# Altium PCB 转接板PCB.PcbDoc
Units mil, origin at the board's own origin, x right, y up, seen from the top; angles counter-clockwise.
Board outline 4741 x 3045 mil, 2 copper layers (Top Layer, Bottom Layer); 31 components, 43 nets, 241 pads, 52 vias.
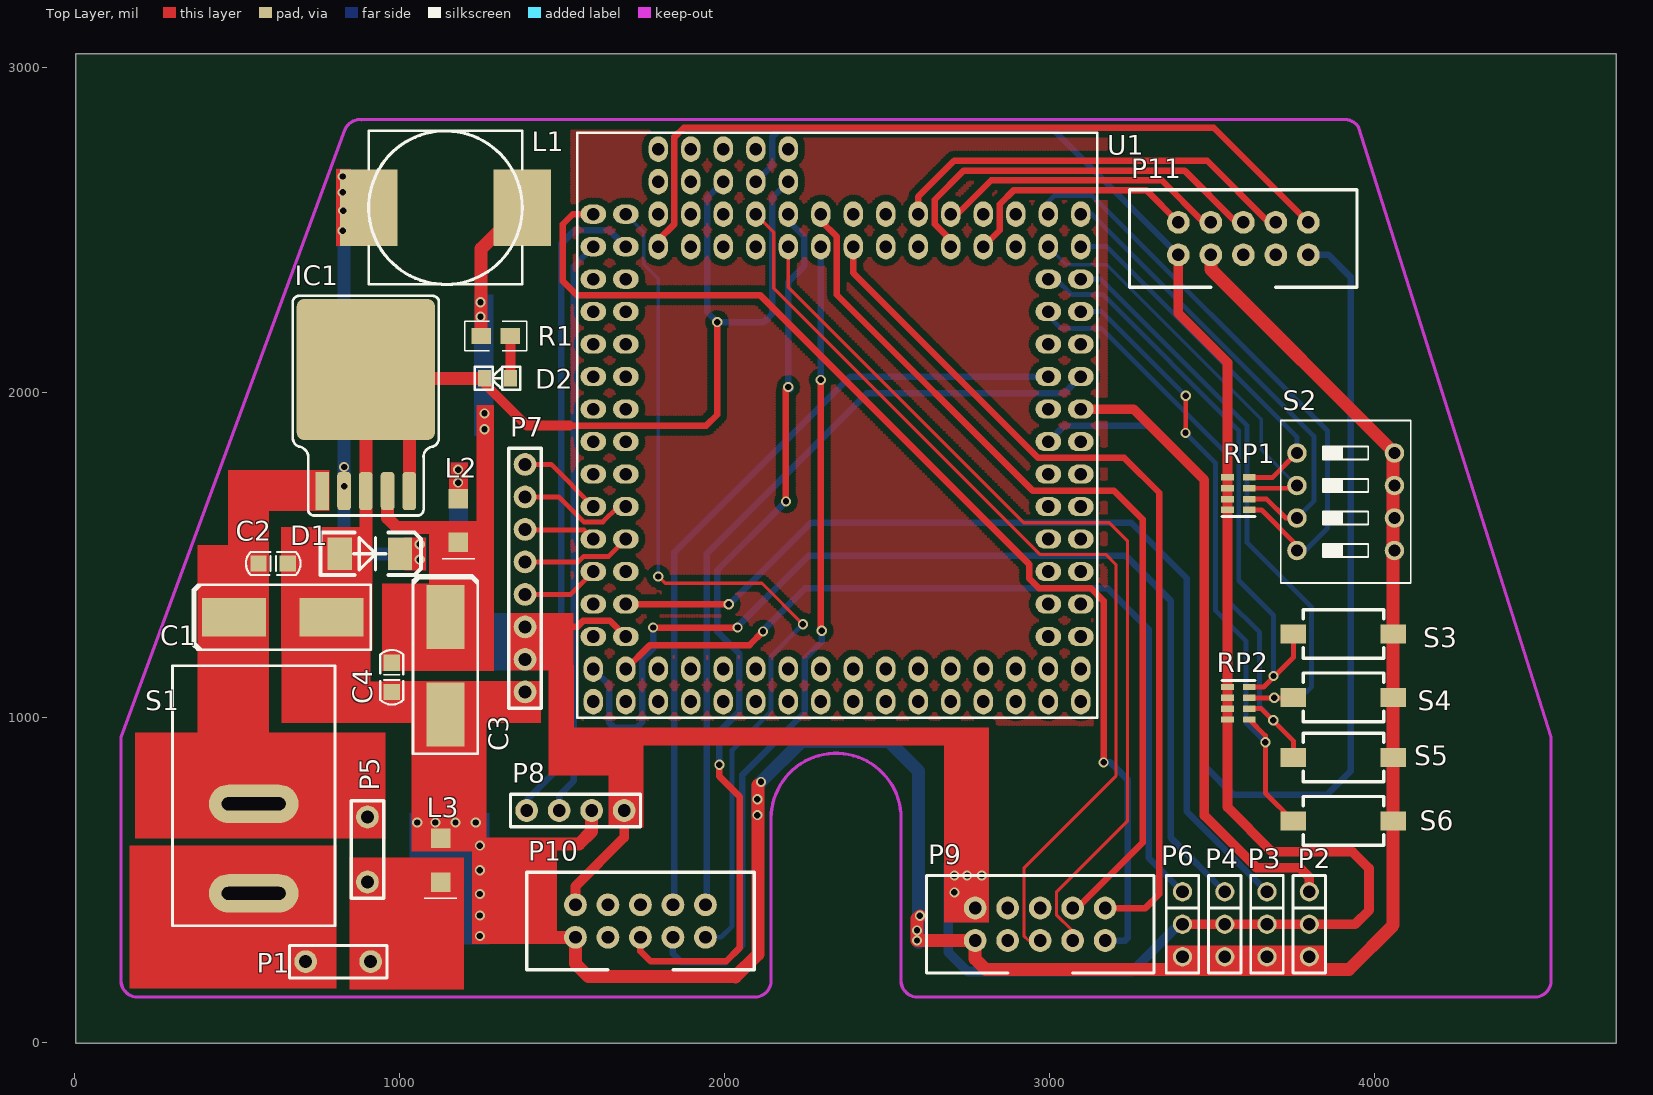
[diagram p0: Top Layer view]
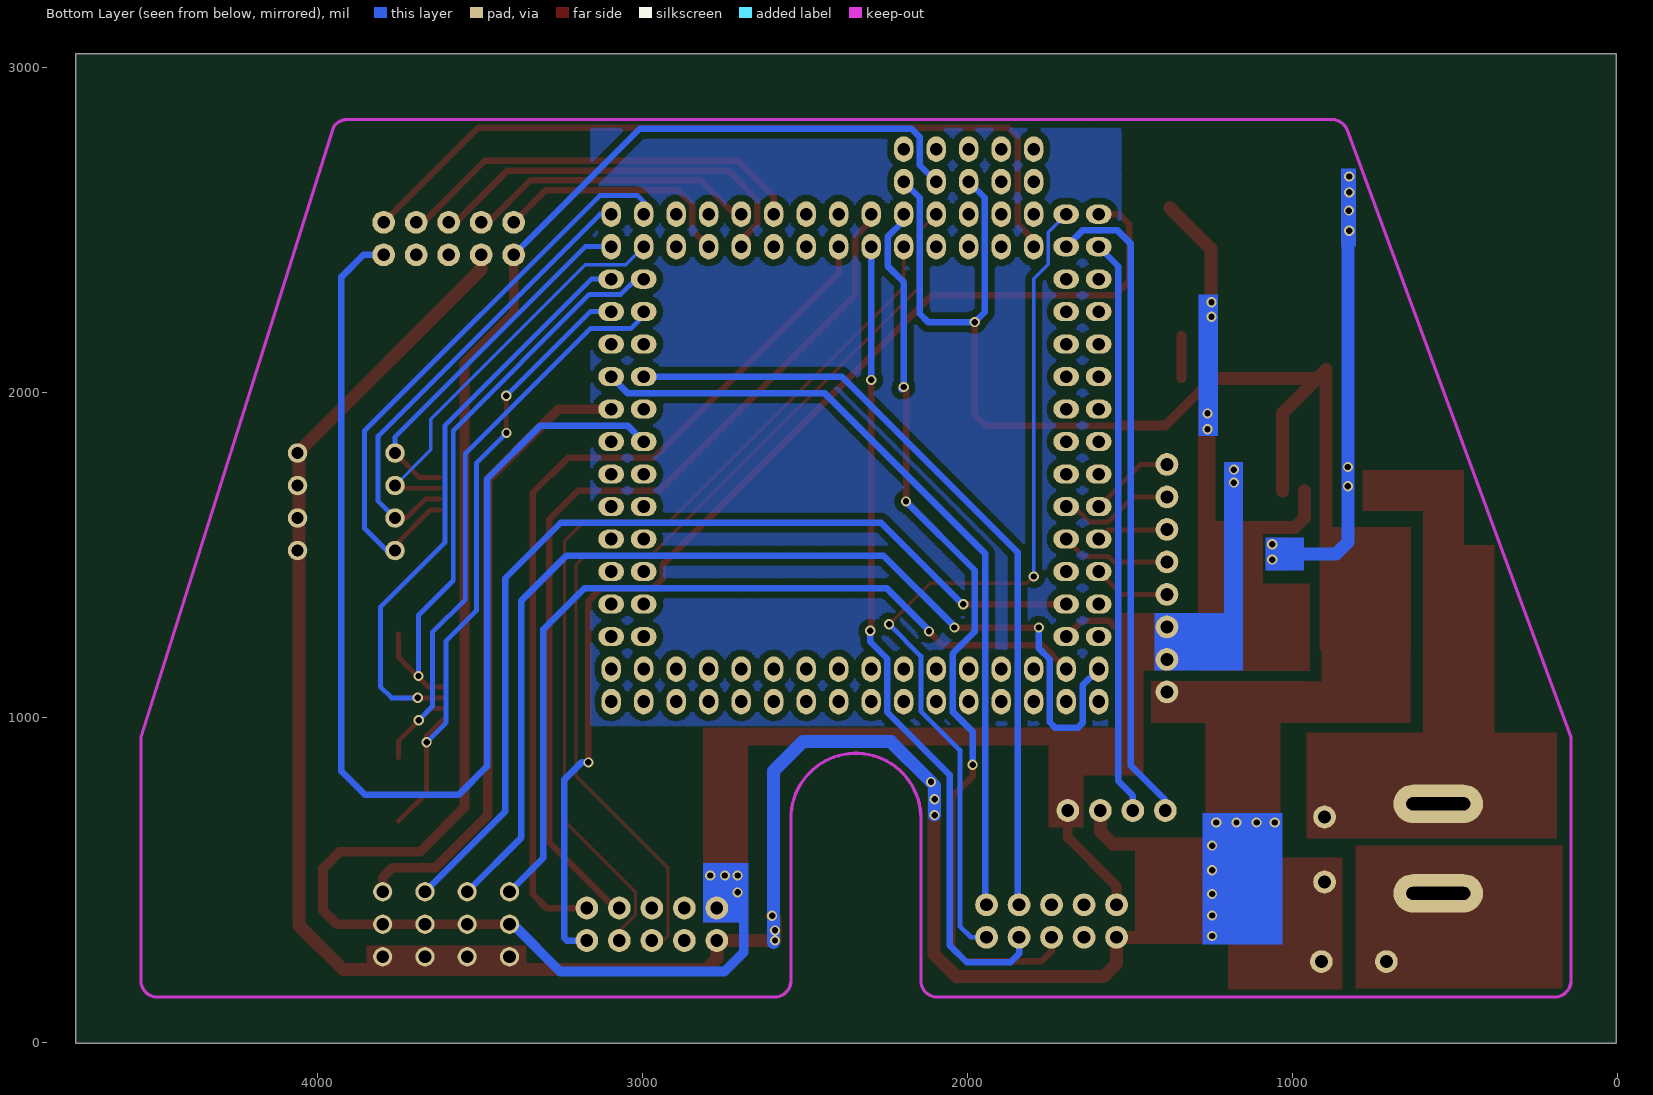
[diagram p1: Bottom Layer view, seen from below]

## Layer stack, top to bottom
Top Layer: signal copper 1.4
Dielectric: dielectric 12.6, FR-4, Dk 4.8
Bottom Layer: signal copper 1.4

## Board outline
4743,-3 2,-3 2,3034 2,3042 4743,3042

## Design rules (kind name [scope] priority, off if disabled: settings)
Clearance [All] p1: gap=20
PolygonConnect [All] p1: connectstyle=Relief reliefconductorwidth=20 reliefentries=4 polygonreliefangle="90 Angle"
RoutingVias [All] p1: holewidth=28 width=50 viastyle="Through Hole" minholewidth=28 minwidth=50 maxholewidth=28 maxwidth=50
SilkscreenOverComponentPads [All] p1: minsilkscreentomaskgap=10
SolderMaskExpansion [All] p1: expansion=4
Width [All] p1: maxlimit=50 minlimit=10 preferedwidth=20
27 further rules are at their usual default settings.

## Components (designator, comment, footprint, x,y, rotation, side; value= is the part's Value field where it differs from the comment)
C1 "470" ccc 490,1308 r0 top
C2 "" C0805 565,1473 r0 top
C3 "470" ccc 1140,1308 r270 top
C4 "" C0805 975,1168 r270 top
D1 "D Zener" D1810 815,1503 r0 top
D2 "LED2" D0805 1340,2043 r180 top
IC1 "LM2596-05" TO-263-5 895,1883 r0 top
L1 "Inductor" L-12*12MM-S 1140,2568 r0 top
L2 "Inductor" L1206 1180,1538 r90 top
L3 "Inductor" L1206 1125,493 r90 top
P1 "Header 2" SIP2-1 710,248 r0 top
P2 "Header 3" SIP3 3798,463 r270 top
P3 "Header 3" SIP3 3668,463 r270 top
P4 "Header 3" SIP3 3538,463 r270 top
P5 "Header 2" SIP2-1 900,693 r270 top
P6 "Header 3" SIP3 3408,463 r270 top
P7 "Header 8" SIP8 1385,1778 r270 top
P8 "Header 4" SIP4 1690,713 r180 top
P9 "Header 5X2" SIP10 2620,213 r90 top
P10 "Header 5X2" SIP10 1390,223 r90 top
P11 "Header 5X2" SIP10 3245,2323 r90 top
R1 "Res2" R0805 1250,2173 r0 top
RP1 "R  PAIZU" 8P4R-0805#1 3575,1688 r90 top
RP2 "R  PAIZU" 8P4R-0805#2 3575,1043 r270 top
S1 "SW-SPST" PCBComponent_1 550,458 r90 top
S2 "SW DIP-4" BM-SW-4 3760,1513 r90 top
S3 "SW-PB" SW-SMD1 4056,1256 r180 top
S4 "SW-PB" SW-SMD1 4056,1061 r180 top
S5 "SW-PB" SW-SMD1 4056,876 r180 top
S6 "SW-PB" SW-SMD1 4056,681 r180 top
U1 "K60" K60-MK 1595,348 r90 top

## Footprints (in the part's own frame and the unit in brackets; to place one, negate y for a bottom-side part, rotate by r counter-clockwise, add the part's x,y. Pads: shape width x height; smd on the part's side, far side on the other; paste and mask are expansions set on the pad)
8P4R-0805#1 [mm]
  rect 0.5x1 smd: 1(-1.27,-0.974) 2(-0.423,-0.974) 3(0.423,-0.974) 4(1.27,-0.974) 5(1.27,0.72) 6(0.423,0.72) 7(-0.423,0.72) 8(-1.27,0.72)
  silkscreen extent -1.78,-1.4 -1.78,1.14
8P4R-0805#2 [mm]
  rect 0.5x1 smd: 1(-1.27,0.974) 2(-0.423,0.974) 3(0.423,0.974) 4(1.27,0.974) 5(1.27,-0.72) 6(0.423,-0.72) 7(-0.423,-0.72) 8(-1.27,-0.72)
  silkscreen extent -1.78,-1.14 -1.78,1.4
BM-SW-4 [mil]
  round 60 hole 36: 1(0,-300) 2(100,-300) 3(200,-300) 4(300,-300) 5(300,0) 6(200,0) 7(100,0) 8(0,0)
  silkscreen extent -100,-350 400,50
C0805 [mil]
  rect 50x50 smd: 1(0,0) 2(90,0)
  silkscreen extent -39,-36 129,36, body extent 6,-24 85,23, height 47
ccc [mm]
  rect 5x3 smd: 1(0,0) 2(7.62,0)
  silkscreen extent -3.25,-2.54 10.67,2.54
D0805 [mil]
  rect 40x50 smd: 1(0,0) 2(80,0)
  silkscreen extent -30,-35 110,35, body extent 0,-17 81,19, height 33
D1810 [mil]
  rect 75x100 smd: 1(0,0) 2(185,0)
  silkscreen extent -60,-65 250,65, body extent -18,-76 202,78, height 98
K60-MK [mm]
  round 1.5 on Top Overlay: 0(16.51,2.54)
  oval 2x1.5 hole 1: 1(17.78,0) 2(20.32,0) 3(17.78,-2.54) 4(20.32,-2.54) 5(17.78,-5.08) 6(20.32,-5.08) 7(17.78,-7.62) 8(20.32,-7.62) 9(17.78,-10.16) 10(20.32,-10.16) 11(17.78,-12.7) 12(20.32,-12.7) 13(17.78,-15.24) 14(20.32,-15.24) 15(17.78,-17.78) 16(20.32,-17.78) 17(17.78,-20.32) 18(20.32,-20.32) 19(17.78,-22.86) 20(20.32,-22.86) 21(17.78,-25.4) 22(20.32,-25.4) 23(17.78,-27.94) 24(20.32,-27.94) 25(17.78,-30.48) 26(20.32,-30.48) 27(17.78,-33.02) 28(20.32,-33.02) 29(17.78,-35.56) 30(20.32,-35.56) 31(17.78,-38.1) 32(20.32,-38.1) 57(53.34,-38.1) 58(53.34,-35.56) 59(55.88,-38.1) 60(55.88,-35.56) 61(55.88,-33.02) 62(53.34,-33.02) 63(55.88,-30.48) 64(53.34,-30.48) 65(55.88,-27.94) 66(53.34,-27.94) 67(55.88,-25.4) 68(53.34,-25.4) 69(55.88,-22.86) 70(53.34,-22.86) 71(55.88,-20.32) 72(53.34,-20.32) 73(55.88,-17.78) 74(53.34,-17.78) 75(55.88,-15.24) 76(53.34,-15.24) 77(55.88,-12.7) 78(53.34,-12.7) 79(55.88,-10.16) 80(53.34,-10.16) 81(55.88,-7.62) 82(53.34,-7.62) 83(55.88,-5.08) 84(53.34,-5.08) 113(58.42,-5.08) 114(60.96,-5.08) 115(58.42,-7.62) 116(60.96,-7.62) 117(58.42,-10.16) 118(60.96,-10.16) 119(58.42,-12.7) 120(60.96,-12.7) 121(58.42,-15.24) 122(60.96,-15.24)
  oval 1.5x2 hole 1: 33(22.86,-38.1) 34(22.86,-35.56) 35(25.4,-38.1) 36(25.4,-35.56) 37(27.94,-38.1) 38(27.94,-35.56) 39(30.48,-38.1) 40(30.48,-35.56) 41(33.02,-38.1) 42(33.02,-35.56) 43(35.56,-38.1) 44(35.56,-35.56) 45(38.1,-38.1) 46(38.1,-35.56) 47(40.64,-38.1) 48(40.64,-35.56) 49(43.18,-38.1) 50(43.18,-35.56) 51(45.72,-38.1) 52(45.72,-35.56) 53(48.26,-38.1) 54(48.26,-35.56) 55(50.8,-38.1) 56(50.8,-35.56) 85(55.88,-2.54) 86(53.34,-2.54) 87(55.88,0) 88(53.34,0) 89(50.8,0) 90(50.8,-2.54) 91(48.26,0) 92(48.26,-2.54) 93(45.72,0) 94(45.72,-2.54) 95(43.18,0) 96(43.18,-2.54) 97(40.64,0) 98(40.64,-2.54) 99(38.1,0) 100(38.1,-2.54) 101(35.56,0) 102(35.56,-2.54) 103(33.02,0) 104(33.02,-2.54) 105(30.48,0) 106(30.48,-2.54) 107(27.94,0) 108(27.94,-2.54) 109(25.4,0) 110(25.4,-2.54) 111(22.86,0) 112(22.86,-2.54)
  silkscreen extent 16.51,-39.37 62.23,1.27
L1206 [mil]
  rect 60x60 smd: 1(0,0) 2(135,0)
  silkscreen extent -50,-50 -50,50, body extent 5,-32 131,31, height 43
L-12*12MM-S [mm]
  rect 4.5x6 smd: 1(-6,0) 2(6,0)
  silkscreen extent -6,-6 6,6, body extent -6.05,-5.94 5.95,6.06, height 8
PCBComponent_1 [mm]
  oval 3x7 hole 1 slot 5 at 90 deg: 1(0,0) 2(7,0)
  silkscreen extent -2.54,-6.35 17.78,6.35
R0805 [mil]
  rect 60x50 smd: 1(0,0) 2(90,0)
  silkscreen extent -50,-45 140,45, body extent 6,-25 85,25, height 22
SIP2-1 [mil]
  round 70 hole 40: 1(0,0) 2(200,0)
  silkscreen extent -50,-50 250,50
SIP3 [mm]
  round 1.5 hole 1: 1(0,0) 2(2.54,0) 3(5.08,0)
  silkscreen extent -1.27,-1.27 6.35,1.27
SIP4 [mil]
  round 70 hole 39.37: 1(0,0) 2(100,0) 3(200,0) 4(300,0)
  silkscreen extent -50,-50 350,50
SIP8 [mil]
  round 70 hole 39.37: 1(0,0) 2(100,0) 3(200,0) 4(300,0) 5(400,0) 6(500,0) 7(600,0) 8(700,0)
  silkscreen extent -50,-50 750,50
SIP10 [mil]
  round 70 hole 39.37: 1(100,-150) 2(200,-150) 3(100,-250) 4(200,-250) 5(100,-350) 6(200,-350) 7(100,-450) 8(200,-450) 9(100,-550) 10(200,-550)
  silkscreen extent 0,-700 300,0
SW-SMD1 [mm]
  rect 2x1.5 smd: 1(0,0) 2(7.8,0)
  silkscreen extent 0.73,-1.9 7.03,1.9, body extent -0.06,-1.95 7.83,1.9, height 2.5
TO-263-5 [mm]
  rect 1.07x3 smd: 1(-3.4,-4.75)
  rrect50% 1.07x3 smd: 2(-1.7,-4.75) 3(0,-4.75) 4(1.7,-4.75) 5(3.4,-4.75)
  rrect10% 10.8x11 smd: 3(0,4.75)
  silkscreen extent -5.7,-6.66 5.7,10.5, body extent -5.14,-4.8 5.09,9.55, height 4.48

## Part data
C1 C2 C3 C4: library part "Cap Pol2", "Polarized Capaci"
D2: "Typical RED, GREEN, YELLOW, AMB"
P1 P2 P3 P4 P5 P6 P7 P8: "He"
P9 P10 P11: "Header, 5-Pi"
S1: "Single-Pole, Single-T"
S2: "DIP Switch, 4 Pos"

## Via types
v1: diameter 31.5, hole 19.68, Top Layer to Bottom Layer, 52 vias

## Nets (pads, with @x,y where several pads share a name; then routed paths per layer and width w, separated by ;. In a path a pad name is that pad's centre, name@x,y a point inside that pad or via, vN(x,y) a via of type N, cw(c..) or ccw(c..) an arc to the next point about the centre after c; other vN are vias at no path point)
5V: L2.2 P2.2 P3.2 P4.2 P6.2 P7.6 P7.7 P8.1 P9.2 P10.2 P11.1 RP1.5 RP1.6 RP1.7 RP1.8 RP2.5 RP2.6 RP2.7 RP2.8 U1.112 U1.119 | length 6367.2
  Top Layer w20: P7.6 1545.12,1278 1564.64,1297.53 1645.47,1297.53 U1.112
  Top Layer w30: P7.7 P7.6 ; P10.2 1540,480 1690,630 P8.1 ; P11.1 3395,2243 3546.67,2091.33 RP1.5 RP1.6 RP1.7 RP1.8 RP2.8 RP2.7 RP2.6 RP2.5 3546.67,798 ; P6.2 P4.2 P3.2 P2.2 3939,363 3982,406 3982,535 3931,586 3684,586 3546.67,723.33 3546.67,798 ; 3546.67,762.33 3546.67,798
  Bottom Layer w20: U1.119 2145.47,2698.47 2145.47,2785.47 2171,2811 3007,2811 P11.1
  Bottom Layer w30: 2687,437 2687,283 2687,278 2747,218 3252,218 3397,363 P6.2
  other v1: 2706,461 2706,513 2745,513 2790,513 1179,1722 1179,1762
C1: P11.2 U1.64 | length 759.9
  Top Layer w20: U1.64 2845.47,2498.47 2845.47,2578.36 2889.12,2622 3296,2622 P11.2
C2: P11.4 U1.65 | length 896.5
  Top Layer w20: U1.65 2715.12,2548 2819.12,2652 3343.78,2652 3472.78,2523 P11.4
C3: P11.6 U1.66 | length 1217.5
  Top Layer w20: U1.66 2695,2468.12 2645.47,2517.64 2645.47,2592.47 2735,2682 3413.78,2682 3572.78,2523 P11.6
C4: P11.8 U1.67 | length 1277.8
  Top Layer w20: U1.67 2595,2602 2705,2712 3483.78,2712 3672.78,2523 P11.8
C5: P11.10 U1.84 | length 2440.8
  Top Layer w20: U1.84 1795,2468.12 1844.53,2517.64 1844.53,2785.53 1873,2814 3504,2814 P11.10
C6: P11.9 U1.46 | length 3648.5
  Bottom Layer w20: U1.46 3044.53,1897.53 3312.47,1897.53 3476,1734 3476,850 3565,761 3852,761 3925,834 3925,2355 3857,2423 P11.9
CE: P7.2 U1.104 | length 361.4
  Top Layer w15: P7.2 1488.65,1678 1565.68,1600.97 1624.32,1600.97 1671.35,1648 U1.104
CLK: P7.5 U1.107 | length 239
  Top Layer w15: P7.5 1525,1378 U1.107
D0: P2.1 U1.47 | length 1948.4
  Top Layer w30: U1.47 3257,1948 3475,1730 3475,698 3636,537 3768,537 3798,507 P2.1
DC: P7.3 U1.105 | length 222.4
  Top Layer w15: P7.3 1387.03,1575.97 1567.03,1575.97 U1.105
DGND: C1.2 C2.2 C3.2 C4.2 D1.1 D2.2 IC1.3 IC1.5 L3.2 P2.3 P3.3 P4.3 P6.3 P7.8 P8.2 P9.1 P10.1 P11.3 S2.1 S2.2 S2.3 S2.4 S3.1 S4.1 S5.1 S6.1 U1.117 U1.121 | length 10640
  Top Layer w20: 1522,1897.53 1942.53,1897.53 1976,1931 v1(1976,2216)
  Top Layer w30: D2.2 1260,2027.53 1390,1897.53 1522,1897.53
  Top Layer w40: 895,1525 895,1695.99 895,2070.01 1028.86,1936.15 IC1.5 ; IC1.3@922.01,2043 D2.2 ; 1211,610 1551,610 1590,649 P8.2 ; v1@1246,399 1322,323 P10.1 1540,242 1580,202 2031,202 ; 2032,201 2101,270 v1@2101,791 ; v1(2600,389) 2591,380 v1(2591,344) v1(2591,313) P9.1 2770,256 2802,224 3920,224 4056,360 S6.1 S5.1 S4.1 S3.1 4056,1813 S2.4 3495,2378 P11.3
  Bottom Layer w20: U1.117 1945.47,2598.47 1945.47,2246.53 v1(1976,2216) 2120,2216 2145.47,2241.47 2145.47,2598.47 U1.121
  Bottom Layer w40: v1(2100,699) 2100,790 v1(2111,801) 2234.73,924.73 2505.27,924.73 2595,835 v1@2595,307
  other v1: 1246,327 1246,390 1246,456 1246,529 1246,605 1053,676 1109,676 1171,676 1233,676 2100,748
DIN: P7.4 U1.106 | length 339
  Top Layer w15: P7.4 1548.65,1478 1565.68,1495.03 1642.03,1495.03 U1.106
DVCC: C1.1 C2.1 IC1.1 P5.1 S1.2
F1: P10.7 U1.74 | length 2544.8
  Top Layer w20: v1@2295,1269 v1(2295,2038)
  Bottom Layer w20: P10.7 1840,272 1866,246 2001,246 2053,298 2053,822.53 2245.47,1015 2245.47,1179.88 2298,1232.41 v1(2298,1266) ; v1(2295,2038) U1.74
F-1: P9.7 U1.76 | length 2832.9
  Top Layer w10: U1.76@2195,2433 2195,2323 2919.53,1598.47 3182.53,1598.47 3239,1542 3239,681 3020,462 3020,392.29 3070,342.29 P9.7
  Top Layer w20: U1.76@2195,2433 U1.76
GND: L3.1 P1.2 P5.2
H0: P3.1 U1.110 | length 2967.1
  Top Layer w20: U1.110 v1(2012,1348)
  Bottom Layer w20: v1@2013,1347 2264.47,1598.47 3250.53,1598.47 3421,1428 3421,710 P3.1
HALL0: P4.1 U1.2 | length 3307.9
  Top Layer w20: v1@1779,1277 v1(1779,1276) v1(2039,1276)
  Bottom Layer w20: U1.2 1644.53,1098.47 1644.53,982.47 1660,967 1728,967 1745.47,984.47 1745.47,1178.36 1779,1211.88 v1(1779,1276) ; v1@2042,1282 2257.53,1497.53 3232.47,1497.53 3371,1359 3371,630 P4.1
HALL1: P6.1 U1.4 | length 2619.4
  Top Layer w20: U1.4 1768,1221 2076,1221 2076,1223 v1(2117,1264)
  Bottom Layer w20: v1@2114,1264 2247.53,1397.53 3176.47,1397.53 3304,1270 3304,567 P6.1
K1: RP1.1 S2.8 U1.60 | length 1808
  Top Layer w15: RP1.1@3623.33,1638 3651,1638 S2.8@3760,1529
  Bottom Layer w15: U1.60 2995,2586 3013.87,2604.87 3130.13,2604.87 3854,1881 3854,1582 3785,1513 S2.8
K2: RP1.2 S2.7 U1.59 | length 1434.3
  Top Layer w15: RP1.2@3623.33,1671.33 3666.67,1671.33 3725,1613 S2.7
  Bottom Layer w15: U1.59 3129,2548 3812,1865 3812,1665 S2.7
K3: RP1.3 S2.6 U1.58 | length 1252.8
  Top Layer w15: RP1.3@3623.33,1704.67 S2.6@3751.67,1704.67
  Bottom Layer w10: U1.58 3050.47,2392.53 3174.47,2392.53 3650,1917 3650,1823 S2.6
K4: RP1.4 S2.5 U1.57 | length 1125
  Top Layer w15: RP1.4@3623.33,1738 3685,1738 S2.5
  Bottom Layer w15: U1.57 3175,2448 3760,1863 S2.5
K5: RP2.1 S3.2 U1.56 | length 1823.7
  Top Layer w15: RP2.1 3658,1093 3748.91,1183.91 S3.2
  Bottom Layer w15: U1.56 3018.65,2348 3065.68,2300.97 3162.03,2300.97 3581,1882 3581,1420.64 3688,1313.64 v1(3688,1127)
K6: RP2.2 S4.2 U1.55 | length 1849.2
  Top Layer w15: RP2.2 v1(3690,1059.67) 3747.58,1059.67 S4.2
  Bottom Layer w15: U1.55 3156,2348 3606,1898 3606,1538 3805,1339 3805,1094 3770.67,1059.67 v1(3690,1059.67)
K7: RP2.3 S5.2 U1.54 | length 1844
  Top Layer w15: RP2.3 3649.67,1026.33 3748.91,927.09 S5.2
  Bottom Layer w15: U1.54 2995,2236 3035,2196 3159,2196 3544,1811 3544,1362 3645,1261 3645,1033 v1(3687,991)
K8: RP2.4 S6.2 U1.53 | length 1969.3
  Top Layer w15: v1@3418,1875 v1(3418,1989) ; RP2.4 3663,943.33 v1(3663,923) 3663,766.91 S6.2
  Bottom Layer w15: U1.53 3159,2248 v1(3418,1989) ; v1@3417,1878 v1(3417,1875) 3510,1782 3510,1328 3603,1235 3603,983 v1(3663,923)
NetC3_1: C3.1 C4.1 IC1.4 L1.2 L2.1 R1.1 | length 837.3
  Top Layer w40: IC1.4 961.93,1613.07 991,1584 1257,1584 ; R1.1 1250,2441.78 L1.2
  other v1: 1260,1886 1260,1935 1248,2232 1248,2277
NetD1_2: D1.2 IC1.2 L1.1 | length 1320.8
  Bottom Layer w40: v1@828.07,2667.93 v1(828.07,1770) v1(828.07,1711.07) 828.07,1538.93 864,1503 1005,1503
  other v1: 1061,1485 1061,1532 824,2497 825,2559 824,2615 824,2664
NetD2_1: D2.1 R1.2 | length 130
  Top Layer w30: D2.1 R1.2
PMQ1: P10.10 U1.49 | length 2452.7
  Bottom Layer w20: P10.10@1944,427 1944,1016.59 1944.53,1017.12 1944.53,1503.53 2438.53,1997.53 3044.53,1997.53 U1.49
PMQ2: P10.8 U1.50 | length 2455.1
  Bottom Layer w20: P10.8@1844,427 1844,1016.59 1844.53,1017.12 1844.53,1507.53 2385,2048 U1.50
PMQ-1: P9.10 U1.72 | length 2721.4
  Top Layer w20: U1.72 2395,2367 2964,1798 3229,1798 3336,1691 3336,455 3294,413 P9.10
PMQ-2: P9.8 U1.73 | length 2786.5
  Top Layer w20: U1.73 2295,2527.88 2344.53,2478.36 2344.53,2410.06 ; 2344,2407.53 2344,2300 2946.47,1697.53 3196.47,1697.53 3285,1609 3285,614 3084,413 P9.8
PWM1: P10.9 U1.85 | length 2807.4
  Top Layer w10: v1(1795,1433) 1816,1412 2114,1412 v1(2240,1286)
  Top Layer w15: P10.9 P10.9@1961,302
  Bottom Layer w10: U1.85 1750.47,2492.53 1750.47,2393.63 1795,2349.1 v1(1795,1433)
  Bottom Layer w15: P10.9 1988,323 2022,357 2022,898.65 2142.03,1018.68 2142.03,1188.03 v1(2240,1286)
PWM-1: P9.9 U1.87 | length 3532.6
  Top Layer w20: U1.87 1532,2548 1501,2517 1501,2342 1544.53,2298.47 1725.36,2298.47 1725.88,2299 2108,2299 2935.63,1471.37 2935.63,1427.49 2965.59,1397.53 3125.36,1397.53 3165,1357.88 v1(3165,861)
  Bottom Layer w20: v1(3165,861) 3186,861 3240,807 3240,322 3231,313 P9.9
R1: P10.5 U1.75 | length 2846.7
  Top Layer w20: P10.5 1740,280 1771,249 2004,249 2045,290 2045,756 1983,818 v1(1983,854) ; v1(2187.83,1664) v1@2187.83,2008.83
  Bottom Layer w20: v1(1983,854) 1983,956.12 2044.53,1017.64 2044.53,1195.47 1976.25,1263.75 1976.25,1452.43 v1(2187.83,1664) ; U1.75 2195,2527.88 2244.53,2478.36 2244.53,2388.63 2195,2339.1 v1(2195,2016) v1@2202,2009
R-1: P9.5 U1.77 | length 2971.8
  Top Layer w10: U1.77 2150.47,2492.53 2150.47,2319.71 2969.19,1501 3172,1501 3203,1470 3203,819 2920,536 2920,327 2934,313 P9.5
RST: P7.1 U1.103 | length 263.8
  Top Layer w15: P7.1 1465,1778 U1.103
RXD: P8.4 U1.86 | length 2024.6
  Bottom Layer w20: P8.4 1390,745 1497,852 1497,2458 1537,2498 1645,2498 U1.86
TXD: P8.3 U1.88 | length 1778.5
  Bottom Layer w20: P8.3 1490,759 1535,804 1535,2388 U1.88
VCC: P1.1 S1.1
pads on no net: P9.3 P9.4 P9.6 P10.3 P10.4 P10.6 P11.5 P11.7 U1.0 U1.1 U1.3 U1.5 U1.6 U1.7 U1.8 U1.9 U1.10 U1.11 U1.12 U1.13 U1.14 U1.15 U1.16 U1.17 U1.18 U1.19 U1.20 U1.21 U1.22 U1.23 U1.24 U1.25 U1.26 U1.27 U1.28 U1.29 U1.30 U1.31 U1.32 U1.33 U1.34 U1.35 U1.36 U1.37 U1.38 U1.39 U1.40 U1.41 U1.42 U1.43 U1.44 U1.45 U1.48 U1.51 U1.52 U1.61 U1.62 U1.63 U1.68 U1.69 U1.70 U1.71 U1.78 U1.79 U1.80 U1.81 U1.82 U1.83 U1.89 U1.90 U1.91 U1.92 U1.93 U1.94 U1.95 U1.96 U1.97 U1.98 U1.99 U1.100 U1.101 U1.102 U1.108 U1.109 U1.111 U1.113 U1.114 U1.115 U1.116 U1.118 U1.120 U1.122

## Polygon pours and split planes (outlines as drawn)
no net on Bottom Layer "Keep-Out Layer-No Net" (hatched 90Degree grid 8 track 8, pour order 2): 1528,2828 1528,976 3166,976 3156,976 3156,2828
no net on Top Layer "Keep-Out Layer-No Net" (hatched 90Degree grid 8 track 8, pour order 4): 1528,981 1528,2805 3166,2805 3175,2805 3175,976

## Keep-outs
Keep-Out Layer:
  lines w10: 831,2809 142,939 142,189 ccw(c192,189) 192,139 2092,139 ccw(c2092,189) 2142,189 2142,689 cw(c2342,689) 2542,689 2542,189 ccw(c2592,189) 2592,139 4492,139 ccw(c4492,189) 4542,189 4542,939 3949.25,2815.32 ; 831.31,2809.31 cw(c877,2789) 881.98,2838.75 ; 872,2839 3902,2839 cw(c3906.75,2789.23) 3949.33,2815.43

## Other copper
Top Layer:
  rectangle net VCC: 168,165 805,605
  rectangle net DVCC: 184,627 955,953
  rectangle net GND: 845,162 1197,569
  rectangle net DGND: 953,983 1434,1111
  rectangle net DGND: 1036,587 1266,992
  rectangle net DVCC: 377,838 597,1530
  rectangle net DGND: 634,1206 916,1585
  rectangle net DGND: 636,983 953,1110
  rectangle net DGND: 636,1020 909,1233
  rectangle net NetC3_1: 944,1143 1289,1411
  rectangle net NetC3_1: 1090,1411 1289,1604
  rectangle net DVCC: 471,1634 783,1760
  rectangle net DVCC: 471,1518 597,1695
  rectangle net NetD1_2: 803,2450 849,2687
  rectangle net NetD1_2: 1014,1452 1080,1553
  rectangle net 5V: 1151,1644 1209,1784
  rectangle net 5V: 1333,1144 1534,1321
  rectangle net DGND: 3356,214 3848,297
  rectangle net NetC3_1: 1235,1565 1289,1961
  rectangle net 5V: 1457,821 1535,1161
  rectangle net 5V: 1457,821 1750,969
  rectangle net 5V: 1641,660 1750,898
  rectangle net 5V: 1724,913 2714,969
  rectangle net 5V: 2674,368 2813,969
  rectangle net DGND: 1222,302 1484,622
Bottom Layer:
  rectangle net NetD1_2: 803,2449 849,2688
  rectangle net NetD1_2: 963,1452 1081,1553
  rectangle net 5V: 1151,1144 1209,1785
  rectangle net 5V: 1151,1144 1423,1320
  rectangle net NetC3_1: 1228,1865 1288,2301
  rectangle net DGND: 1029,301 1275,705
  rectangle net 5V: 2672,368 2813,551